# Altium PCB PCB1.PcbDoc
Units mil, origin at the board's own origin, x right, y up, seen from the top; angles counter-clockwise.
Board outline 3149.61 x 3937.01 mil, 2 copper layers (Top Layer, Bottom Layer); 99 components, 61 nets, 330 pads, 799 vias.
Unrouted connection lines stored in the file: 3.
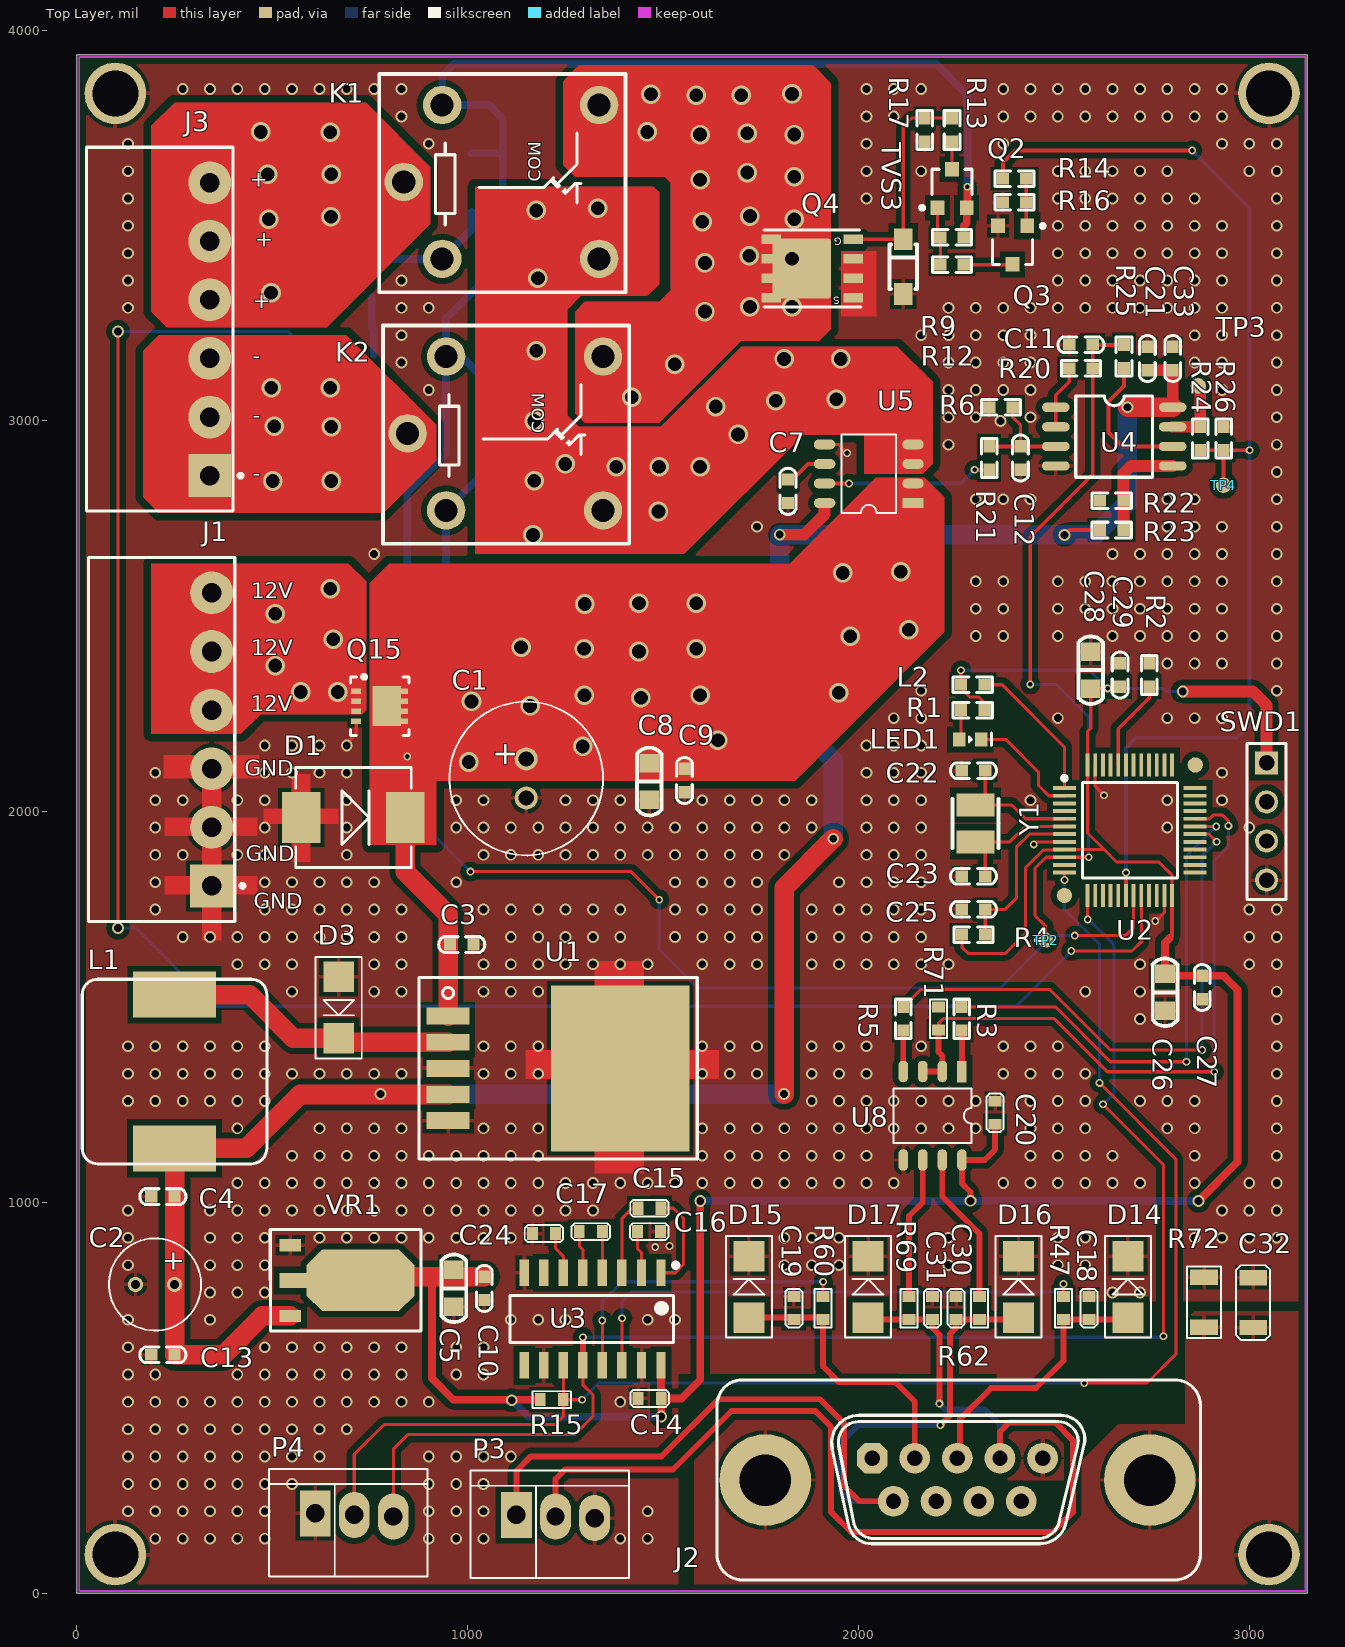
[diagram p0: Top Layer view]
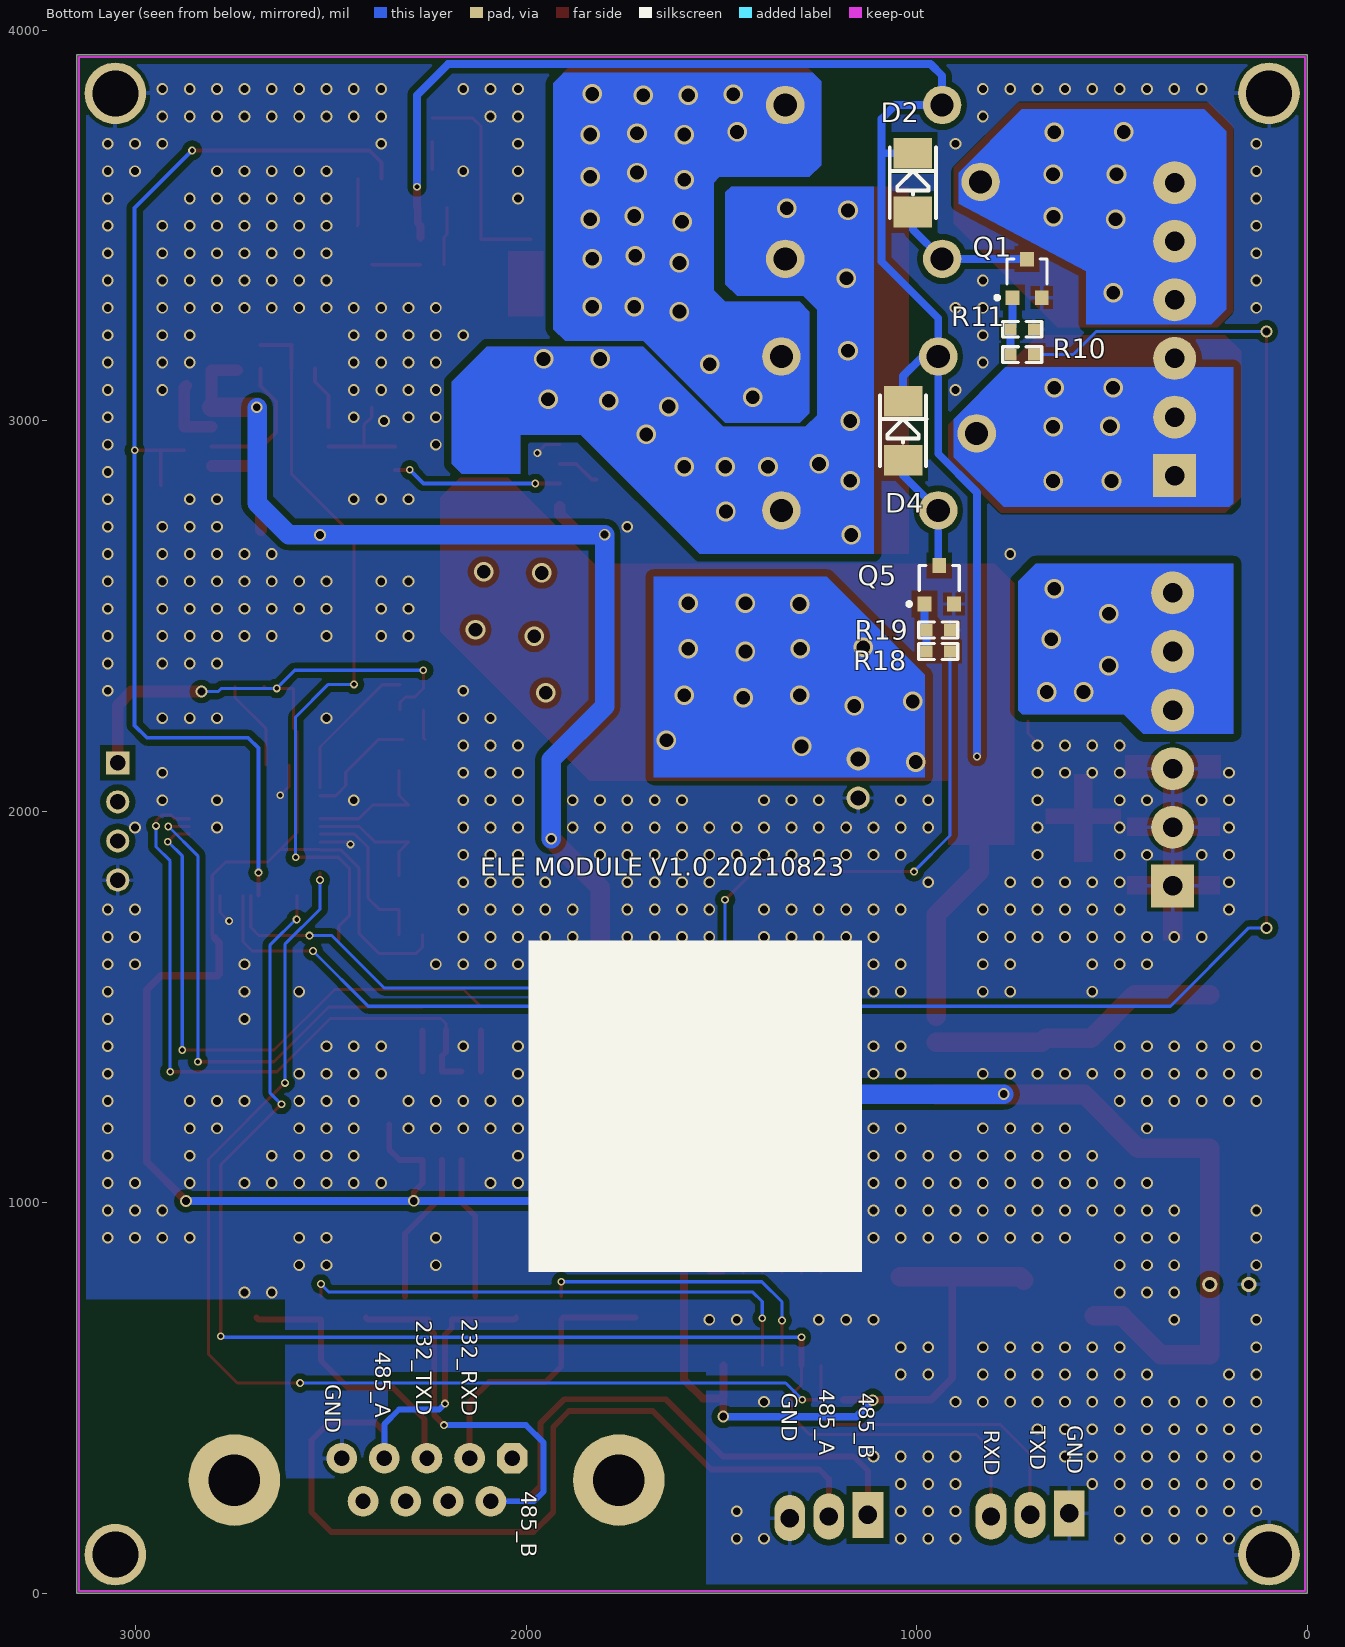
[diagram p1: Bottom Layer view, seen from below]
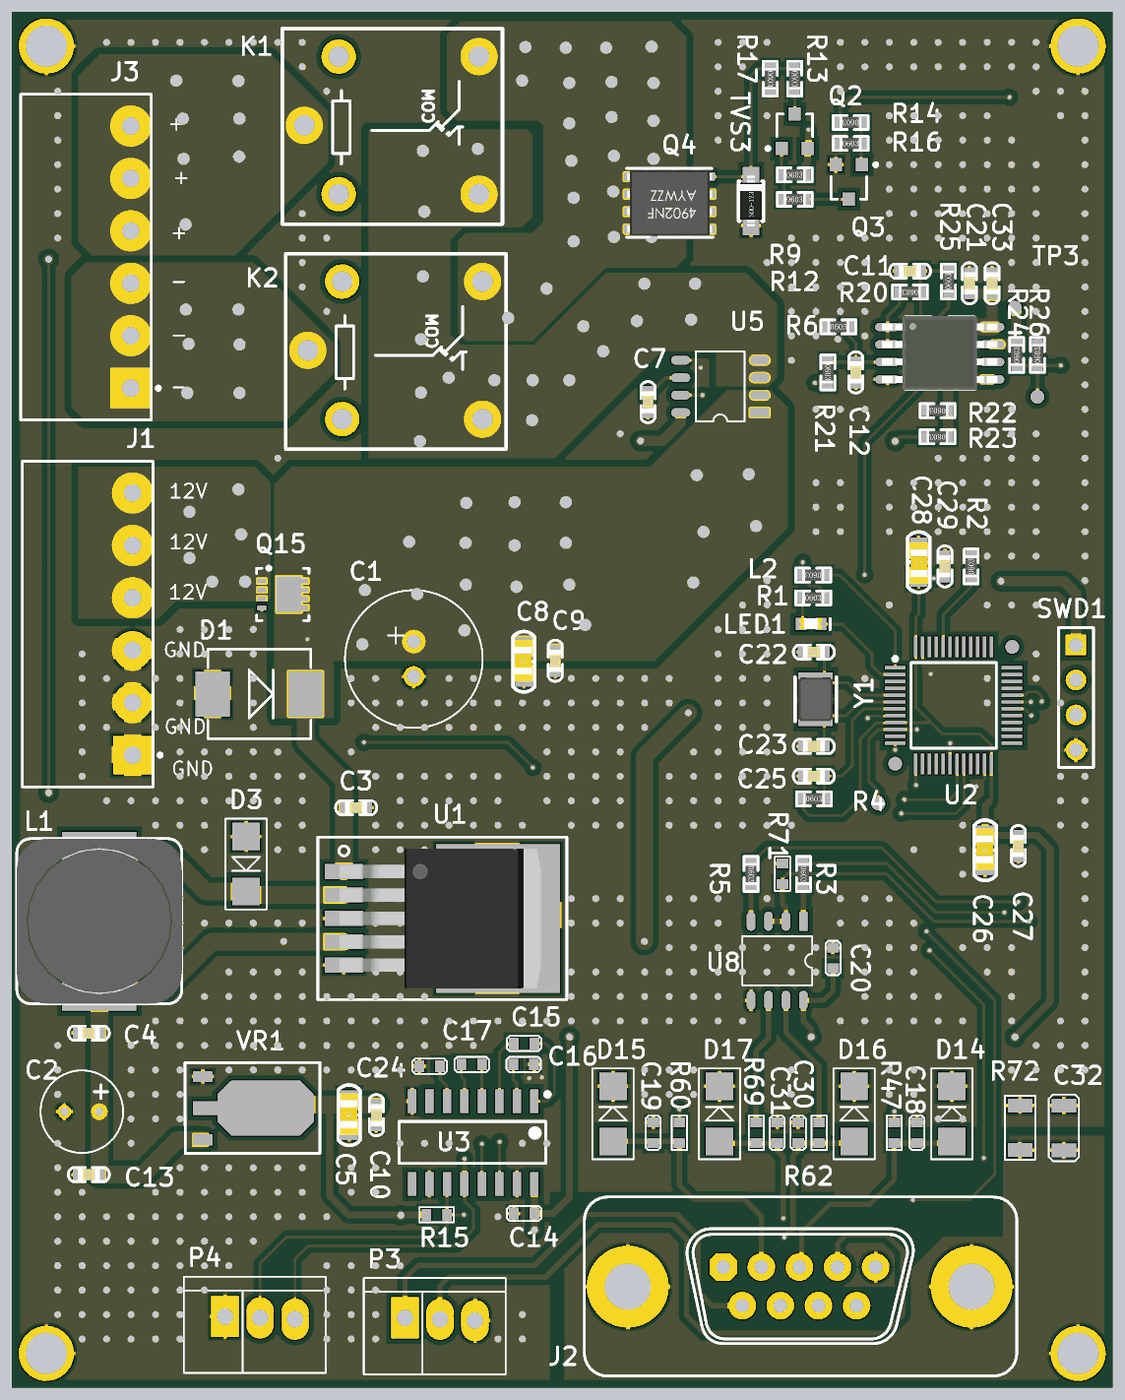
[diagram p2: 3D render of the assembled board from above, using the file's embedded part models]
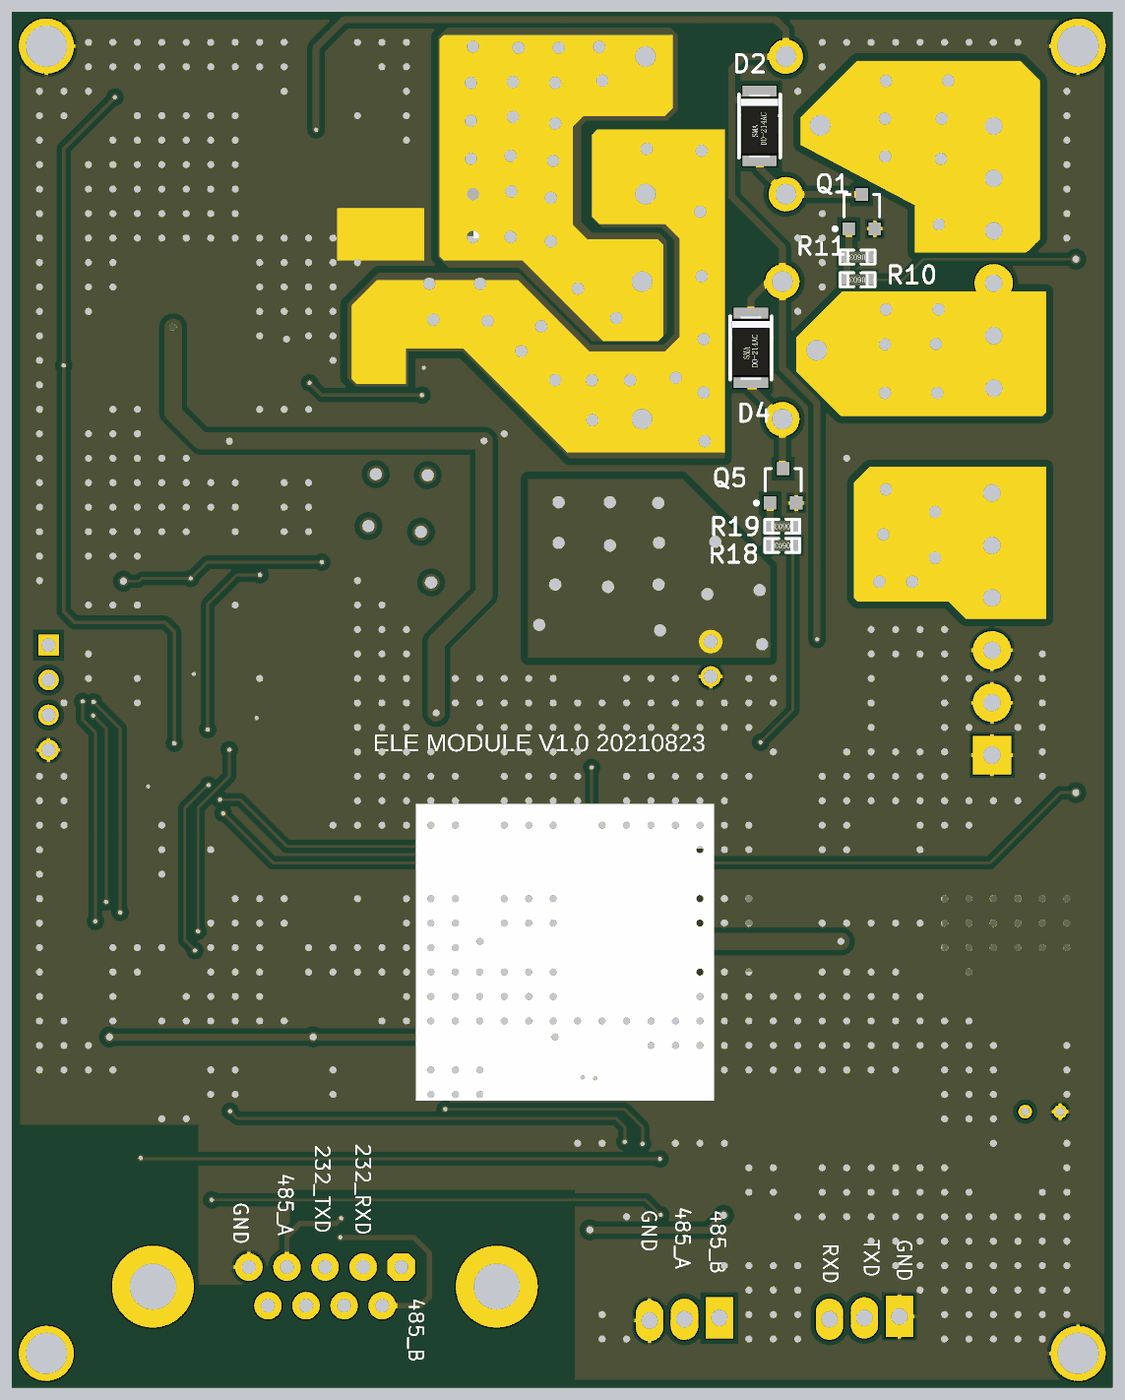
[diagram p3: 3D render of the assembled board from below, using the file's embedded part models]

## Layer stack, top to bottom
Top Solder: solder mask 0.4, Solder Resist, Dk 3.5
Top Layer: signal copper 1.4
Dielectric 1: dielectric 12.6, FR-4, Dk 4.8
Bottom Layer: signal copper 1.4
Bottom Solder: solder mask 0.4, Solder Resist, Dk 3.5

## Board outline
0,0 0,3937.01 3149.61,3937.01 3149.61,0

## Design rules (kind name [scope] priority, off if disabled: settings)
Clearance gnd [All] p1: gap=10 except(15: Track-Poly SMDPad-Poly THPad-Poly Via-Poly Fill-Fill Poly-Poly; 20: Arc-Poly Fill-Poly Poly-Region)
Clearance [All] p2: gap=10
DiffPairsRouting [All] p1: maxlimit=10 minlimit=10 mostfreqgap=10 toplayer_minwidth=15 toplayer_maxwidth=15 toplayer_prefwidth=15 bottomlayer_minwidth=15 bottomlayer_maxwidth=15 bottomlayer_prefwidth=15 maxuncoupledlength=500
MinimumSolderMaskSliver [All] p1: minsoldermaskwidth=1
PolygonConnect PolygonConnect_1 [isvia] p1: connectstyle=Direct reliefconductorwidth=10 reliefentries=4 polygonreliefangle="90 Angle" airgapwidth=10
PolygonConnect [All] p2: connectstyle=Relief reliefconductorwidth=10 reliefentries=4 polygonreliefangle="90 Angle" airgapwidth=10
RoutingVias [All] p1: holewidth=28 width=50 viastyle="Through Hole" minholewidth=28 minwidth=50 maxholewidth=28 maxwidth=50
SilkToSolderMaskClearance [IsPad] p1: minsilkscreentomaskgap=1 clearancetoexposedcopper=TRUE
SolderMaskExpansion [All] p1: expansion=4
Width [All] p1: maxlimit=500 minlimit=5 preferedwidth=10
27 further rules are at their usual default settings.

## Classes and differential pairs
component class 02_Power: C1 C2 C3 C4 C5 C8 C9 C10 C13 D1 D3 J1 L1 Q15 U1 VR1
component class 03_MCU: C22 C23 C25 C26 C27 C28 C29 L2 LED1 R1 R2 R3 R4 R5 SWD1 U2 Y1
component class 07_EL_CON: C7 C11 C12 C21 C33 C? D2 D4 J3 K1 K2 Q1 Q2 Q3 Q4 Q5 R6 R9 R10 R11 R12 R13 R14 R16 R17 R18 R19 R20 R21 R22 R23 R24 R25 R26 R? TP2 TP3 TP4 TVS3 U4 U5 U?
component class com: C14 C15 C16 C17 C18 C19 C20 C24 C30 C31 C32 D14 D15 D16 D17 J2 P3 P4 R15 R47 R60 R62 R69 R71 R72 U3 U8
differential pair 485: +485_P -485_N

## Components (designator, comment, footprint, x,y, rotation, side; value= is the part's Value field where it differs from the comment)
C1 "1000uF/35V" 10*16 1150,2085 r90 top
C2 "100uF/35V" 6*8 200,790 r0 top
C3 "104 50V" SMD-0603C 985,1660 r180 top
C4 "104 50V" SMD-0603C 220,1015 r0 top
C5 "10uF 25V" SMD-0805C 965,780 r90 top
C7 "104 50V" SMD-0603C 1820,2820 r270 top
C8 "10uF25V" SMD-0805C 1465,2077.24 r90 top
C9 "104 50V" SMD-0603C 1555,2080 r90 top
C10 "104 50V" SMD-0603C 1042.68,779.99 r90 top
C11 "NC" SMD-0603C 2570,3195 r0 top
C12 "104 50V" SMD-0603C 2415,2905 r270 top
C13 "104 50V" SMD-0603C 220,610 r0 top
C14 "104 50V" 0603C 1495.43,498.48 r180 top
C15 "104 50V" 0603C 1495,985 r180 top
C16 "104 50V" 0603C 1435,925 r0 top
C17 "104 50V" 0603C 1285.94,925 r0 top
C18 "220PF/16V" 0603C 2590,700 r90 top
C19 "220PF/16V" 0603C 1835,700 r90 top
C20 "104 50V" 0603C 2350,1200 r90 top
C21 "104 50V" SMD-0603C 2740,3160 r270 top
C22 "12P 50V" SMD-0603C 2295,2105 r180 top
C23 "12P 50V" SMD-0603C 2295,1835 r180 top
C24 "104 50V" 0603C 1225,920 r180 top
C25 "104 50V" SMD-0603C 2295,1750 r0 top
C26 "10uF 25V" SMD-0805C 2785,1537.76 r90 top
C27 "104 50V" SMD-0603C 2880,1550 r90 top
C28 "10uF 25V" SMD-0805C 2595,2362.24 r270 top
C29 "104 50V" SMD-0603C 2670,2350 r270 top
C30 "220PF/16V" 0603C 2250,700 r90 top
C31 "220PF/16V" 0603C 2190,700 r90 top
C32 "1NF/2KV" 1206C 3010.55,807.63 r270 top
C33 "104 50V" SMD-0603C 2805,3160 r270 top
D1 "SMCJ24CA" SMC 574.25,1985 r0 top
D2 "1N4007" DO-214-AC 1010,3610 r90 bottom
D3 "SS34" SMA 670,1577.48 r270 top
D4 "1N4007" DO-214-AC 1035,2975 r90 bottom
D14 "SMAJ18CA" SMA 2690,705 r90 top
D15 "SMAJ18CA" SMA 1720,705 r90 top
D16 "SMAJ6.5CA" SMA 2410,705 r90 top
D17 "SMAJ6.5CA" SMA 2025,705 r90 top
J1 "HEADER_6" DB2ERC-3P81-6P 345,1810 r90 top
J2 "DB-9P-02" DIP-9 2035.47,345.34 r0 top
J3 "HEADER_6" DB2ERC-3P81-6P 340,2860 r90 top
K1 "SRA-12VDC-CL-5" "SRA- 12V" 836.57,3611.85 r270 top
K2 "SRA-12VDC-CL-5" "SRA- 12V" 846.57,2968.15 r270 top
L1 "33uH/5a" CDRH-127 250,1335 r270 top
L2 "MPZ1608D101BTA00" SMD-0603 2292.9,2325 r180 top
LED1 "LED G" SMD-0603D 2286.27,2185.48 r0 top
P3 "1*3P" 3X2.54MMZ2 1125,200 r0 top
P4 "1*3P" 3X2.54MMZ2 610,203.94 r0 top
Q1 "SS8050" SOT-23 717.5,3365 r180 bottom
Q2 "S8550" SOT-23 2240,3595 r0 top
Q3 "SS8050" SOT-23 2395,3450 r180 top
Q4 "TPCA8016" "DFN-8 5X6" 1987.12,3465 r180 top
Q5 "SS8050" SOT-23 942.5,2580.79 r180 bottom
Q15 "AONR21321" DFN3*3-8 775,2270 r270 top
R1 "1K" SMD-0603 2292.9,2260 r0 top
R2 "100K" SMD-0603 2745,2350 r90 top
R3 "1K" SMD-0603 2265,1470 r270 top
R4 "100K" SMD-0603 2295,1685 r0 top
R5 "1K" SMD-0603 2115,1470 r270 top
R6 "10K" SMD-0603 2365,3035.39 r0 top
R9 "47K" SMD-0603 2240,3470 r0 top
R10 "1K" SMD-0603 730,3170 r0 bottom
R11 "47K" SMD-0603 730,3235 r0 bottom
R12 "2K" SMD-0603 2240,3400 r0 top
R13 "1K" SMD-0603 2240,3745 r270 top
R14 "4.7K" SMD-0603 2400,3620 r180 top
R15 "4.7K" 0603R 1185.94,495 r0 top
R16 "10K" SMD-0603 2400,3560 r0 top
R17 "4.7K" SMD-0603 2170,3745 r270 top
R18 "1K" SMD-0603 945,2410 r0 bottom
R19 "47K" SMD-0603 945,2465 r0 bottom
R20 "100R" SMD-0603 2570,3135 r180 top
R21 "10K" SMD-0603 2335,2905 r270 top
R22 "18K" SMD-0603 2648.51,2795.76 r180 top
R23 "30K" SMD-0603 2648.51,2720.76 r180 top
R24 "20K" SMD-0603 2875,2955 r90 top
R25 "47K" SMD-0603 2680,3165 r90 top
R26 "30K" SMD-0603 2935,2955 r90 top
R47 "22R 5%" 0603R 2525,759.06 r270 top
R60 "22R 5%" 0603R 1910,759.06 r270 top
R62 "8.2R 5%" 0603R 2310,759.06 r270 top
R69 "8.2R 5%" 0603R 2130,759.06 r270 top
R71 "10K" 0603R 2205,1440.94 r90 top
R72 "10M 5%" 1206r 2885,807.95 r270 top
SWD1 "SIP-4 (NC)" SIP-4 3045,1975 r270 top
TP2 "TPS" tpd 2479.44,1671.41 r0 top
TP3 "TPS" tpd 2870,3090 r0 top
TP4 "TPS" tpd 2934.57,2835.42 r0 top
TVS3 "SMF10CA" SOD-123 2115,3395 r90 top
U1 "LM2596S 5.0V" TO-263-5 950,1343.07 r270 top
U2 "GD32F103C8T6" LQFP48 2527.52,2060.59 r0 top
U3 "TPT3232E-SO3R/NC" SO-16Z 1495,820 r270 top
U4 "OPA2376AIDR" SOIC-8 2655,2960 r0 top
U5 "ACS712ELCTR-20A-T" SO-8 2140,2790 r180 top
U8 "TP8485E-SR" SO-8 2265,1335 r270 top
VR1 "LM1117 3.3V" SOT223 546.06,890.55 r270 top
Y1 "8MHz" XTAL-3225-2 2300,1970 r270 top

## Footprints (in the part's own frame and the unit in brackets; to place one, negate y for a bottom-side part, rotate by r counter-clockwise, add the part's x,y. Pads: shape width x height; smd on the part's side, far side on the other; paste and mask are expansions set on the pad)
3X2.54MMZ2 [mm]
  rect 2x3 hole 1.2: 1(0,0)
  oval 2x3 hole 1.2: 2(2.54,-0.1) 3(5.08,-0.2)
  silkscreen extent -3,-4.1 7.31,2.9
6*8 [mm]
  round 1 hole 0.6: 1(1.27,0) 2(-1.27,0)
  silkscreen extent -3,-3 3,3
10*16 [mm]
  round 1.5 hole 1: 1(1.27,0) 2(-1.27,0)
  silkscreen extent -5,-5 5,5
0603C [mm]
  rect 0.7x0.85 smd: 1(0,0) 2(1.5,0)
  silkscreen extent -0.5,-0.55 2,0.55
0603R [mm]
  rect 0.7x0.85 smd: 1(0,0) 2(1.5,0)
  silkscreen extent -0.5,-0.55 2,0.55
1206C [mm]
  rect 1x1.8 smd: 1(0,0) 2(3.25,0)
  silkscreen extent -0.8,-1.1 4.05,1.1
1206r [mm]
  rect 1x1.8 smd: 1(0,0) 2(3.25,0)
  silkscreen extent -0.7,-1.1 3.95,1.1
CDRH-127 [mm]
  rect 3x5.4 smd: 1(-5,0) 2(5,0)
  silkscreen extent -6,-6 6,6, body extent -6,-6 6,6, height 8.2
DB2ERC-3P81-6P [mil]
  rect 109.84x109.84 hole 50: 1(0,0)
  round 109.84 hole 50: 2(150,0) 3(300,0) 4(450,0) 5(600,0) 6(750,0)
  silkscreen extent -91,-84 841,315
DFN3*3-8 [mm]
  rect 0.35x0.65 smd: 1(0.975,-1.525) 2(-0.975,1.525) 2(-0.325,1.525) 2(0.325,1.525) 2(0.975,1.525) 3(-0.975,-1.525) 3(-0.325,-1.525) 3(0.325,-1.525)
  rect 2.6x1.84 smd: 2(0,0.45)
  silkscreen extent -2.03,-1.9 1.9,1.9, body extent -1.75,-1.75 1.75,1.75, height 0.8
"DFN-8 5X6" [mm]
  rrect10% 1.27x0.61 smd: 1(0,0) 2(5.34,0) 2(5.34,1.27) 2(5.34,3.81) 2(5.34,2.54) 3(0,3.81) 3(0,1.27) 3(0,2.54)
  rrect10% 3.81x3.91 smd: 2(3.356,1.905)
  silkscreen extent -0.5,-0.6 5.8,4.4, body extent -0.41,-0.67 5.74,4.48, height 1
DIP-9 [mm]
  oct 2x2 hole 1: 1(0,0)
  round 2 hole 1: 2(2.77,0) 3(5.54,0) 4(8.31,0) 5(11.08,0) 6(9.695,-2.803) 7(6.925,-2.803) 8(4.155,-2.803) 9(1.385,-2.803)
  round 5.95 hole 3.35: 10(-6.94,-1.42) 11(18.055,-1.42)
  silkscreen extent -10.09,-7.92 21.34,5.09
DO-214-AC [mm]
  rect 2x2.5 smd: 1(-1.915,0) 2(1.915,0)
  silkscreen extent -2.3,-1.52 2.3,1.5, body extent -2.3,-1.35 2.3,1.35, height 2.4
LQFP48 [mm]
  round 1 smd: 0(0,-6.985) 0(8.509,1.5)
  rect 1.5x0.25 smd: 1(0,0) 2(0,-0.5) 3(0,-1) 4(0,-1.5) 5(0,-2) 6(0,-2.5) 7(0,-3) 8(0,-3.5) 9(0,-4) 10(0,-4.5) 11(0,-5) 12(0,-5.5) 25(8.495,-5.5) 26(8.495,-5) 27(8.495,-4.5) 28(8.495,-4) 29(8.495,-3.5) 30(8.495,-3) 31(8.495,-2.5) 32(8.495,-2) 33(8.495,-1.5) 34(8.495,-1) 35(8.495,-0.5) 36(8.495,0)
  rect 0.25x1.5 smd: 13(1.5,-7) 14(2,-7) 15(2.5,-7) 16(3,-7) 17(3.5,-7) 18(4,-7) 19(4.5,-7) 20(5,-7) 21(5.5,-7) 22(6,-7) 23(6.5,-7) 24(7,-7) 37(7,1.5) 38(6.5,1.5) 39(6,1.5) 40(5.5,1.5) 41(5,1.5) 42(4.5,1.5) 43(4,1.5) 44(3.5,1.5) 45(3,1.5) 46(2.5,1.5) 47(2,1.5) 48(1.5,1.5)
  silkscreen extent -0.13,-5.86 7.35,0.76
SIP-4 [mm]
  rect 1.5x1.5 hole 1: 1(-3.81,0)
  round 1.5 hole 1: 2(-1.27,0) 3(1.27,0) 4(3.81,0)
  silkscreen extent -5.08,-1.27 5.08,1.27
SMA [mm]
  rect 2x2 smd: 1(0,0) 2(4,0)
  silkscreen extent -1.3,-1.5 5.3,1.5
SMC [mm]
  rect 2.5x3.3 smd: 1(0,0) 2(6.75,0)
  silkscreen extent -0.35,-3.25 7.15,3.25
SMD-0603 [mil]
  rect 31.5x30 smd: 1(-30,0) 2(30,0)
  silkscreen extent -50,-20 50,20, body extent -31,-16 32,16, height 18
SMD-0603C [mil]
  rect 31.5x30 smd: 1(-30,0) 2(30,0)
  silkscreen extent -59,-20 59,20, body extent -32,-16 32,16, height 31
SMD-0603D [mm]
  rect 0.8x0.9 smd: 1(-0.7,-0.012) 2(0.73,-0.012)
  silkscreen extent -0.08,-0.41 1.4,0.39, body extent -0.8,-0.39 0.8,0.41, height 0.6
SMD-0805C [mm]
  rect 1.2x1.27 smd: 1(-1.2,0) 2(1.2,0)
  silkscreen extent -2.2,-0.8 2.2,0.8, body extent -1.42,-0.67 1.58,0.73, height 0.93
SO-8 [mil]
  rect 55x25 smd: 1(0,0)
  oval 55x25 smd: 2(0,-50) 3(0,-100) 4(0,-150) 5(226.38,-150) 6(226.38,-100) 7(226.38,-50) 8(226.38,0)
  silkscreen extent 43,-175 183,25
SO-16Z [mil]
  rect 68x24 smd: 1(0,0) 2(0,-50) 3(0,-100) 4(0,-150) 5(0,-200) 6(0,-250) 7(0,-300) 8(0,-350) 9(237.11,-350) 10(237.11,-300) 11(237.11,-250) 12(237.11,-200) 13(237.11,-150) 14(237.11,-100) 15(237.11,-50) 16(237.11,0)
  silkscreen extent -19,-387 178,38
SOD-123 [mm]
  rect 1.4x1.2 smd: 1(-1.778,0) 2(1.778,0)
  silkscreen extent -1.45,-0.9 1.45,0.9, body extent -1.85,-0.8 1.85,0.8, height 1.2
SOIC-8 [mm]
  oval 1.8x0.6 smd: 1(-3.8,1.905) 2(-3.8,0.635) 3(-3.8,-0.635) 4(-3.8,-1.905) 5(3.8,-1.905) 6(3.8,-0.635) 7(3.8,0.635) 8(3.8,1.905)
  silkscreen extent -2.5,-2.64 2.5,2.64, body extent -4.2,-2.69 4.2,2.69, height 2.3
SOT223 [mm]
  rect 0.8x1.4 smd: 1(0,0) 3(4.6,0)
  rect 1x1.854 smd: 2(2.3,0.227)
  oct 4x7 smd: 4(2.286,4.572)
  silkscreen extent -1.02,-1.3 5.59,8.51
SOT-23 [mm] "SOT-23; 3 Leads; Body 3.0 x 2.6 mm, inc. leads (LxW max)"
  rect 0.9x0.95 smd: 1(-0.95,-1.25) 2(0.95,-1.25) 3(0,1.25)
  silkscreen extent -2.08,-1.37 1.3,1.25
"SRA- 12V" [mm]
  round 2.5 hole 1.5: 1(0,0) 2(5,12.7) 3(-5,12.7) 4(5,2.5) 5(-5,2.5)
  silkscreen extent -7.03,-1.59 7.17,14.41
TO-263-5 [mm]
  rect 1.1x2.8 smd: 1(-3.4,0) 2(-1.7,0) 3(0,0) 4(1.7,0) 5(3.4,0)
  rect 10.8x9 smd: 6(0,11.2)
  silkscreen extent -5.9,-1.9 5.9,16.2, body extent -5.08,-0.32 5.08,14.32, height 4.57
tpd [mm]
  round 1 smd: 1(0,0)
XTAL-3225-2 [mm]
  rect 1.5x2.5 smd: 1(-1.2,0) 2(1.2,0)
  silkscreen extent -1.6,-1.5 1.6,1.5, body extent -1.6,-1.25 1.6,1.25, height 0.9

## Part data
C1 C2: library part CAP2, "电解电容"
C3 C4 C8 C9 C10 C11 C12 C13: library part CAP4, "贴片电容 10%"
C5 C21 C25 C26 C27 C28 C29 C33: library part CAP4, "贴片电容 20%"
C7: library part C, "贴片电容 10%"
C14 C15 C16 C17 C18 C19 C20 C24 C30 C31 C32: library part CAP
C22 C23: library part CAP4, "贴片电容 5%"
D1 D3: library part DIODE
D2 D4: library part DIODE2, "贴片二极管"
D14 D15 D16 D17: library part D_ESD
J2: library part DB9
K1 K2: library part JDQ1, "5V 继电器"
L1: library part IND
L2: library part CIZHU1, "磁珠电感 100R 100MHz"
LED1: library part LED, "绿色普亮"
P3 P4: library part HDR1*3
Q1 Q3 Q5: library part NPN-1, "三极管"
Q2: library part PNP, "PNP"
Q4: library part SI7860
Q15: library part "MOSFET N", "MOSFET N"
R1 R20: library part RES0, "贴片电阻 5%"
R2 R3 R4 R5 R10 R11 R18 R19: library part RES2, "贴片电阻 5%"
R6 R21: library part RES0, "贴片电阻 1%"
R9 R12 R13 R14 R16 R17 R22 R23 R24 R25 R26: library part RES-SOP, "贴片电阻 5%"
R15 R47 R60 R62 R69 R71 R72: library part RES
SWD1: library part SIP-4, "ISP 下载"
TVS3: library part TVS-1, "TVS 10V"
U1: library part LM2596
U2: library part STM32F103C6
U3: library part TPT3232E-SO3R
U4: library part LM358, "运算放大器"
U5: library part ACS712, "HALL 20A 电流传感器"
VR1: library part LM1117, "三端稳压器"
Y1: library part XTAL, "3225 贴片晶振"

## Free pads (board coordinates)
  round 157.48 hole 118.11: 0(98.43,98.43) 0(98.43,3838.58) 0(3051.18,98.43) 0(3051.18,3838.58)

## Via types
v1: diameter 30, hole 20, Top Layer to Bottom Layer, tented both sides, 679 vias
v2: diameter 50, hole 35, Top Layer to Bottom Layer, tented both sides, 79 vias
v3: diameter 20, hole 12, Top Layer to Bottom Layer, tented both sides, 41 vias

## Nets (pads, with @x,y where several pads share a name; then routed paths per layer and width w, separated by ;. In a path a pad name is that pad's centre, name@x,y a point inside that pad or via, vN(x,y) a via of type N, cw(c..) or ccw(c..) an arc to the next point about the centre after c; other vN are vias at no path point)
3.3V: C5.2 C10.2 C14.1 C20.1 C26.2 C27.2 C28.2 C29.2 L2.2 R1.2 R4.1 R15.1 SWD1.1 U2.9 U2.24 U2.48 U3.16 U8.8 VR1.2 | length 7012.2
  Top Layer w8: C14.1@1495,498.91 C14.1 ; v3(2262.9,2361.89) L2.2 2262.9,2315.25 2284.51,2293.64 2308.02,2293.64 2322.9,2278.76 R1.2 ; R4.1 2265,1653.1 2280.62,1637.48 2376.74,1637.48 2427.84,1688.57 2427.84,1856.35 2473.83,1902.35 2526.76,1902.35 U2.9 2629.04,1903.11 ; C29.2 2665,2315 C28.2 2595,2213.71 2586.57,2205.29 U2.48 2586.57,1945.57 2629.04,1903.11 ; U2.24 2803.11,1837.11 2768.86,1871.36 2660.79,1871.36 2629.04,1903.11
  Top Layer w10: 2796.67,1676.47 2803.11,1682.91 U2.24
  Top Layer w15: v1(2287.36,1003.93) 2287.36,1026.63 2265,1049 U8.8 2323.62,1108.62 2350,1135 C20.1
  Top Layer w20: 908.97,809.99 908.97,549.73 963.7,495 R15.1 ; C14.1@1495,498.91 U3.16 ; v1(1495.43,451.79) C14.1 1547.77,498.48 1595.65,546.36 v1(1595.65,1003.6) ; 2796.67,1676.47 2785,1664.8 C26.2 2790,1580 C27.2 2934.85,1580 2970.64,1544.21 2970.64,1103.73 v1(2870.52,1003.6)
  Top Layer w30: v1(2830.52,2307.75) 3009.78,2307.75 3045,2272.53 SWD1.1
  Top Layer w50: 726.06,800.55 735.5,809.99 908.97,809.99 C10.2
  Bottom Layer w8: v3(2262.9,2361.89) 2591.85,2361.89 v3(2638.11,2315.62) 2779.58,2315.62 2787.45,2307.75 v1(2830.52,2307.75)
  Bottom Layer w20: v1(1113.01,493.51) 1155.21,451.31 v1@1495.43,451.31 ; v1(1595.65,1003.6) v1(2870.52,1003.6)
485_N: C30.1 D16.1 J2.9 P3.1 R62.2 | length 2348.9
  Top Layer w15: P3.1 1125,313.19 1161.82,350 1496.35,350 1642.62,496.27 1902.05,496.27 1963.38,434.94 1963.38,274.4 2002.78,235 J2.9 ; v3(2210,430) 2235,455 2235,663.72 2250,678.72 C30.1 R62.2 2405,700 D16.1
  Bottom Layer w15: J2.9 1980,235 1955,260 1955,385 2000,430 v3(2210,430)
485_P: C31.1 D17.1 J2.4 P3.2 R69.2 | length 2889.3
  Top Layer w15: P3.2 1225,291.65 1249.58,316.24 1525.97,316.24 1675.58,465.84 1889.85,465.84 1930.42,425.27 1930.42,207.2 1981.13,156.49 2498.4,156.49 2549.12,207.2 2549.12,391.31 2503.31,437.12 2386.66,437.12 2362.64,413.1 J2.4 ; D17.1 2030,700 R69.2 C31.1 2190,678.72 2207.5,661.22 v3(2207.5,485)
  Bottom Layer w15: v3(2207.5,485) 2222.5,470 2325,470 2362.64,432.36 J2.4
ELE_PWM: R14.2 R24.1 R26.1 TP4.1 U2.18 | length 3006.5
  Top Layer w10: R14.2 2370,3661.71 2400.76,3692.47 v3(2854.65,3692.47) ; U2.18 v3(2685,1843.97) ; R24.1 R26.1 ; TP4.1 2935,2835.85 R26.1 ; v3(3001.64,2925) R26.1
  Bottom Layer w10: v3(2685,1843.97) 2685,2162.9 2711.26,2189.16 2969.82,2189.16 3001.64,2220.98 v3(3001.64,2925) 3001.64,3545.47 v3(2854.65,3692.47)
EN1_485: R71.1 U2.32 U8.2 U8.3 | length 1696.7
  Top Layer w8: R71.1 2205,1457.67 2217.58,1470.25 2285.8,1470.25 2285.89,1470.34 2501.61,1470.34 2637.54,1334.42 v3(2910.85,1334.42) ; U2.32 2898.8,1981.85 2908.14,1991.18 2932.83,1991.18 2947.15,1976.86 v3(2947.15,1963.67)
  Top Layer w15: U8.3 U8.2 2215,1375 2205,1385 R71.1
  Bottom Layer w8: v3(2910.85,1334.42) 2910.85,1874.01 2947.15,1910.31 v3(2947.15,1963.67)
GND: C1.2 C2.2 C3.1 C4.1 C5.1 C7.2 C8.1 C9.1 C10.1 C11.1 C12.2 C13.1 C14.2 C16.2 C18.2 C19.2 C20.2 C21.1 C22.2 C23.2 C24.2 C25.1 C26.1 C27.1 C28.1 C29.1 C30.2 C31.2 C32.1 C33.1 D1.1 D3.1 D14.2 D15.2 D16.2 D17.2 J1.1 J1.2 J1.3 J2.5 P3.3 P4.1 pad.0@98.43,98.43 pad.0@98.43,3838.58 pad.0@3051.18,3838.58 Q1.2 Q3.2 Q4.3 Q5.2 Q15.1 R2.2 R6.1 R11.1 R16.1 R17.2 R19.1 R22.2 R26.2 R71.2 R72.1 SWD1.4 TVS3.1 U1.3 U1.5 U1.6 U2.8 U2.23 U2.47 U3.8 U3.10 U3.15 U4.4 U5.5 U8.5 VR1.1 | length 381.2
  Top Layer w8: v1@690,2175 714.96,2199.96 Q15.1 ; U5.5 1949.31,2940 v3@1973.15,2916.16 ; v3@2448.63,1915.84 2454.83,1922.03 2526.76,1922.03 U2.8 ; U2.47 2606.26,2065.02 v3(2629.04,2042.24) ; v3@2760,1718.5 2783.43,1741.93 U2.23
  other v1: 200.78,139.48 270.78,139.48 340.78,139.48 410.78,139.48 480.78,139.48 900.78,139.48 970.78,139.48 1040.78,139.48 1390.78,139.48 1460.78,139.48 130.78,209.48 200.78,209.48 270.78,209.48 340.78,209.48 410.78,209.48 480.78,209.48 900.78,209.48 970.78,209.48 1040.78,209.48 1460.78,209.48 130.78,279.48 200.78,279.48 270.78,279.48 340.78,279.48 410.78,279.48 480.78,279.48 550.78,279.48 900.78,279.48 970.78,279.48 1040.78,279.48 130.78,349.48 200.78,349.48 270.78,349.48 340.78,349.48 410.78,349.48 480.78,349.48 550.78,349.48 620.78,349.48 900.78,349.48 970.78,349.48 1040.78,349.48 1110.78,349.48 130.78,419.48 200.78,419.48 270.78,419.48 340.78,419.48 410.78,419.48 480.78,419.48 550.78,419.48 620.78,419.48 690.78,419.48 130.78,489.48 200.78,489.48 270.78,489.48 340.78,489.48 410.78,489.48 480.78,489.48 550.78,489.48 620.78,489.48 690.78,489.48 760.78,489.48 830.78,489.48 900.78,489.48 1390.78,489.48 130.78,559.48 200.78,559.48 410.78,559.48 480.78,559.48 550.78,559.48 620.78,559.48 690.78,559.48 760.78,559.48 830.78,559.48 970.78,559.48 1040.78,559.48 130.78,629.48 480.78,629.48 550.78,629.48 620.78,629.48 690.78,629.48 760.78,629.48 830.78,629.48 970.78,629.48 1040.78,629.48 130.78,699.48 340.78,699.48 1110.78,699.48 1180.78,699.48 1250.78,699.48 1460.78,699.48 1530.78,699.48 340.78,769.48 410.78,769.48 480.78,769.48 2650.78,769.48 2720.78,769.48 130.78,839.48 340.78,839.48 410.78,839.48 480.78,839.48 1810.78,839.48 1880.78,839.48 1950.78,839.48 2230.78,839.48 2510.78,839.48 2580.78,839.48 130.78,909.48 340.78,909.48 410.78,909.48 480.78,909.48 620.78,909.48 690.78,909.48 760.78,909.48 830.78,909.48 900.78,909.48 970.78,909.48 1040.78,909.48 1110.78,909.48 1810.78,909.48 1880.78,909.48 1950.78,909.48 2230.78,909.48 2510.78,909.48 2580.78,909.48 2860.78,909.48 2930.78,909.48 3000.78,909.48 3070.78,909.48 130.78,979.48 340.78,979.48 410.78,979.48 480.78,979.48 550.78,979.48 620.78,979.48 690.78,979.48 760.78,979.48 830.78,979.48 900.78,979.48 970.78,979.48 1040.78,979.48 1110.78,979.48 1180.78,979.48 1250.78,979.48 1320.78,979.48 2930.78,979.48 3000.78,979.48 3070.78,979.48 410.78,1049.48 480.78,1049.48 550.78,1049.48 620.78,1049.48 690.78,1049.48 760.78,1049.48 830.78,1049.48 900.78,1049.48 970.78,1049.48 1040.78,1049.48 1110.78,1049.48 1180.78,1049.48 1250.78,1049.48 1320.78,1049.48 1390.78,1049.48 1460.78,1049.48 1530.78,1049.48 1600.78,1049.48 1670.78,1049.48 1740.78,1049.48 1810.78,1049.48 1880.78,1049.48 1950.78,1049.48 2020.78,1049.48 2090.78,1049.48 2370.78,1049.48 2440.78,1049.48 2510.78,1049.48 2580.78,1049.48 2650.78,1049.48 2720.78,1049.48 2860.78,1049.48 3000.78,1049.48 3070.78,1049.48 550.78,1119.48 620.78,1119.48 690.78,1119.48 760.78,1119.48 830.78,1119.48 900.78,1119.48 970.78,1119.48 1040.78,1119.48 1110.78,1119.48 1180.78,1119.48 1600.78,1119.48 1670.78,1119.48 1740.78,1119.48 1810.78,1119.48 1880.78,1119.48 1950.78,1119.48 2020.78,1119.48 2440.78,1119.48 2510.78,1119.48 2580.78,1119.48 2650.78,1119.48 2860.78,1119.48 3070.78,1119.48 410.78,1189.48 620.78,1189.48 690.78,1189.48 760.78,1189.48 830.78,1189.48 1040.78,1189.48 1110.78,1189.48 1180.78,1189.48 1600.78,1189.48 1670.78,1189.48 1740.78,1189.48 1810.78,1189.48 1880.78,1189.48 1950.78,1189.48 2020.78,1189.48 2090.78,1189.48 2160.78,1189.48 2230.78,1189.48 2300.78,1189.48 2440.78,1189.48 2510.78,1189.48 2580.78,1189.48 2790.78,1189.48 2860.78,1189.48 3070.78,1189.48 130.78,1259.48 200.78,1259.48 270.78,1259.48 340.78,1259.48 410.78,1259.48 480.78,1259.48 1880.78,1259.48 1950.78,1259.48 2020.78,1259.48 2090.78,1259.48 2160.78,1259.48 2230.78,1259.48 2300.78,1259.48 2440.78,1259.48 2510.78,1259.48 2580.78,1259.48 2720.78,1259.48 2790.78,1259.48 2860.78,1259.48 3070.78,1259.48 130.78,1329.48 200.78,1329.48 270.78,1329.48 340.78,1329.48 410.78,1329.48 480.78,1329.48 550.78,1329.48 620.78,1329.48 690.78,1329.48 760.78,1329.48 830.78,1329.48 1040.78,1329.48 1110.78,1329.48 1180.78,1329.48 1600.78,1329.48 1670.78,1329.48 1740.78,1329.48 1880.78,1329.48 1950.78,1329.48 2020.78,1329.48 2370.78,1329.48 2440.78,1329.48 2510.78,1329.48 2580.78,1329.48 3070.78,1329.48 130.78,1399.48 200.78,1399.48 270.78,1399.48 340.78,1399.48 410.78,1399.48 480.78,1399.48 1040.78,1399.48 1110.78,1399.48 1180.78,1399.48 1600.78,1399.48 1670.78,1399.48 1740.78,1399.48 1880.78,1399.48 1950.78,1399.48 2020.78,1399.48 2160.78,1399.48 2370.78,1399.48 2440.78,1399.48 2510.78,1399.48 3070.78,1399.48 2720.78,1469.48 3070.78,1469.48 550.78,1539.48 760.78,1539.48 830.78,1539.48 1040.78,1539.48 1110.78,1539.48 1180.78,1539.48 2580.78,1539.48 2720.78,1539.48 3070.78,1539.48 410.78,1609.48 480.78,1609.48 550.78,1609.48 760.78,1609.48 830.78,1609.48 1040.78,1609.48 1110.78,1609.48 1180.78,1609.48 1250.78,1609.48 1320.78,1609.48 1390.78,1609.48 1460.78,1609.48 1600.78,1609.48 1670.78,1609.48 1740.78,1609.48 1880.78,1609.48 1950.78,1609.48 2020.78,1609.48 2090.78,1609.48 2160.78,1609.48 2230.78,1609.48 2720.78,1609.48 3000.78,1609.48 3070.78,1609.48 270.78,1679.48 340.78,1679.48 410.78,1679.48 480.78,1679.48 550.78,1679.48 620.78,1679.48 690.78,1679.48 760.78,1679.48 830.78,1679.48 1110.78,1679.48 1180.78,1679.48 1250.78,1679.48 1320.78,1679.48 1390.78,1679.48 1530.78,1679.48 1600.78,1679.48 1670.78,1679.48 1740.78,1679.48 1880.78,1679.48 1950.78,1679.48 2020.78,1679.48 2090.78,1679.48 2160.78,1679.48 3000.78,1679.48 3070.78,1679.48 200.78,1749.48 480.78,1749.48 550.78,1749.48 620.78,1749.48 690.78,1749.48 760.78,1749.48 830.78,1749.48 1040.78,1749.48 1110.78,1749.48 1180.78,1749.48 1250.78,1749.48 1320.78,1749.48 1390.78,1749.48 1530.78,1749.48 1600.78,1749.48 1670.78,1749.48 1740.78,1749.48 1880.78,1749.48 1950.78,1749.48 2020.78,1749.48 2090.78,1749.48 2160.78,1749.48 3000.78,1749.48 3070.78,1749.48 200.78,1819.48 480.78,1819.48 550.78,1819.48 620.78,1819.48 690.78,1819.48 760.78,1819.48 970.78,1819.48 1530.78,1819.48 1600.78,1819.48 1670.78,1819.48 1740.78,1819.48 1950.78,1819.48 2020.78,1819.48 2090.78,1819.48 2160.78,1819.48 200.78,1889.48 270.78,1889.48 410.78,1889.48 480.78,1889.48 690.78,1889.48 1040.78,1889.48 1110.78,1889.48 1180.78,1889.48 1250.78,1889.48 1320.78,1889.48 1390.78,1889.48 1460.78,1889.48 1530.78,1889.48 1600.78,1889.48 1670.78,1889.48 1740.78,1889.48 1810.78,1889.48 2020.78,1889.48 2090.78,1889.48 2160.78,1889.48 200.78,1959.48 480.78,1959.48 690.78,1959.48 970.78,1959.48 1040.78,1959.48 1110.78,1959.48 1180.78,1959.48 1250.78,1959.48 1320.78,1959.48 1390.78,1959.48 1460.78,1959.48 1530.78,1959.48 1600.78,1959.48 1670.78,1959.48 1740.78,1959.48 1810.78,1959.48 1880.78,1959.48 2020.78,1959.48 2090.78,1959.48 2160.78,1959.48 2790.78,1959.48 3000.78,1959.48 200.78,2029.48 270.78,2029.48 410.78,2029.48 480.78,2029.48 690.78,2029.48 970.78,2029.48 1040.78,2029.48 1250.78,2029.48 1320.78,2029.48 1390.78,2029.48 1600.78,2029.48 1670.78,2029.48 1740.78,2029.48 1810.78,2029.48 1880.78,2029.48 2020.78,2029.48 2090.78,2029.48 2160.78,2029.48 2440.78,2029.48 2790.78,2029.48 2930.78,2029.48 200.78,2099.48 480.78,2099.48 550.78,2099.48 620.78,2099.48 690.78,2099.48 2020.78,2099.48 2090.78,2099.48 2160.78,2099.48 2930.78,2099.48 480.78,2169.48 550.78,2169.48 620.78,2169.48 690.78,2169.48 2020.78,2169.48 2090.78,2169.48 2160.78,2169.48 2090.78,2239.48 2160.78,2239.48 2510.78,2239.48 2790.78,2239.48 2860.78,2239.48 2930.78,2239.48 2160.78,2309.48 3070.78,2309.48 2790.78,2379.48 2860.78,2379.48 2930.78,2379.48 3070.78,2379.48 2300.78,2449.48 2370.78,2449.48 2510.78,2449.48 2650.78,2449.48 2720.78,2449.48 2790.78,2449.48 2860.78,2449.48 2930.78,2449.48 3070.78,2449.48 2300.78,2519.48 2370.78,2519.48 2510.78,2519.48 2580.78,2519.48 2650.78,2519.48 2720.78,2519.48 2790.78,2519.48 2860.78,2519.48 2930.78,2519.48 3070.78,2519.48 2300.78,2589.48 2370.78,2589.48 2510.78,2589.48 2580.78,2589.48 2650.78,2589.48 2720.78,2589.48 2790.78,2589.48 2860.78,2589.48 2930.78,2589.48 3070.78,2589.48 760.78,2659.48 2650.78,2659.48 2720.78,2659.48 2790.78,2659.48 2860.78,2659.48 2930.78,2659.48 3070.78,2659.48 1740.78,2729.48 2790.78,2729.48 2860.78,2729.48 2930.78,2729.48 3070.78,2729.48 2300.78,2799.48 2370.78,2799.48 2440.78,2799.48 2790.78,2799.48 2860.78,2799.48 3070.78,2799.48 3070.78,2869.48 2230.78,2939.48 3070.78,2939.48 2363.7,3000 2230.78,3009.48 2300.78,3009.48 2440.78,3009.48 3070.78,3009.48 900.78,3079.48 2230.78,3079.48 2300.78,3079.48 2370.78,3079.48 2440.78,3079.48 2930.78,3079.48 3070.78,3079.48 830.78,3149.48 2230.78,3149.48 2300.78,3149.48 2370.78,3149.48 2440.78,3149.48 2860.78,3149.48 2930.78,3149.48 3070.78,3149.48 830.78,3219.48 2160.78,3219.48 2230.78,3219.48 2300.78,3219.48 2370.78,3219.48 2440.78,3219.48 2860.78,3219.48 2930.78,3219.48 3070.78,3219.48 130.78,3289.48 830.78,3289.48 900.78,3289.48 2230.78,3289.48 2300.78,3289.48 2370.78,3289.48 2440.78,3289.48 2510.78,3289.48 2580.78,3289.48 2650.78,3289.48 2720.78,3289.48 2790.78,3289.48 2860.78,3289.48 2930.78,3289.48 3070.78,3289.48 130.78,3359.48 830.78,3359.48 2510.78,3359.48 2580.78,3359.48 2650.78,3359.48 2720.78,3359.48 2790.78,3359.48 2860.78,3359.48 2930.78,3359.48 3070.78,3359.48 130.78,3429.48 2510.78,3429.48 2580.78,3429.48 2650.78,3429.48 2720.78,3429.48 2790.78,3429.48 2860.78,3429.48 2930.78,3429.48 3070.78,3429.48 130.78,3499.48 2510.78,3499.48 2580.78,3499.48 2650.78,3499.48 2720.78,3499.48 2790.78,3499.48 2860.78,3499.48 2930.78,3499.48 3070.78,3499.48 130.78,3569.48 2020.78,3569.48 2510.78,3569.48 2580.78,3569.48 2650.78,3569.48 2720.78,3569.48 2790.78,3569.48 2860.78,3569.48 3070.78,3569.48 130.78,3639.48 2020.78,3639.48 2160.78,3639.48 2510.78,3639.48 2580.78,3639.48 2650.78,3639.48 2720.78,3639.48 2790.78,3639.48 3000.78,3639.48 3070.78,3639.48 130.78,3709.48 900.78,3709.48 2020.78,3709.48 2370.78,3709.48 2930.78,3709.48 3000.78,3709.48 3070.78,3709.48 830.78,3779.48 2020.78,3779.48 2090.78,3779.48 2370.78,3779.48 2440.78,3779.48 2510.78,3779.48 2580.78,3779.48 2650.78,3779.48 2720.78,3779.48 2790.78,3779.48 2860.78,3779.48 2930.78,3779.48 270.78,3849.48 340.78,3849.48 410.78,3849.48 480.78,3849.48 550.78,3849.48 620.78,3849.48 690.78,3849.48 760.78,3849.48 830.78,3849.48 2020.78,3849.48 2090.78,3849.48 2160.78,3849.48 2370.78,3849.48 2440.78,3849.48 2510.78,3849.48 2580.78,3849.48 2650.78,3849.48 2720.78,3849.48 2790.78,3849.48 2860.78,3849.48 2930.78,3849.48
  other v3: 1480.3,885.55 1516.83,888.27 2760,1720.38 2449.14,1916.35 1971.05,2918.26
J3-2: C19.1 D15.1 J2.2 R60.2 | length 728.8
  Top Layer w15: D15.1 1905,705 R60.2 1910,580 1950,540 2095,540 2144.53,490.47 J2.2
J3-3: C18.1 D14.1 J2.3 R47.2 | length 701.5
  Top Layer w15: J2.3 2260,351.75 2260,445 2340,525 2455,525 2525,595 R47.2 C18.1 2685,700 D14.1
LED1: LED1.2 U2.2 | length 292.1
  Top Layer w8: LED1.2 2377.23,2185 2461.37,2100.86 2461.37,2066.88 2487.35,2040.91 U2.2
NetC7_1: C7.1 U5.6 | length 110.2
  Top Layer w10: C7.1 1831.52,2850 1871.52,2890 U5.6
NetC11_2: C11.2 R20.1 R25.2 TP2.1 U2.10 | length 1902.5
  Top Layer w8: v3(2440.15,2325.87) 2440.15,2703.91 2600,2863.77 R20.1 ; TP2.1 2479.44,1706.68 2452.17,1733.95 2452.17,1855.24 2480.36,1883.43 U2.10 v3(2589.6,1883.43)
  Top Layer w10: R20.1 C11.2 R25.2
  Bottom Layer w8: v3(2440.15,2325.87) 2505.97,2325.87 2589.6,2242.24 v3(2589.6,1883.43)
NetC12_1: C12.1 R6.2 R21.1 U4.3 | length 279.1
  Top Layer w8: R6.2 2395,3010 2415,2990 C12.1
  Top Layer w10: R21.1 C12.1 U4.3
NetC15_1: C15.1 U3.1 | length 252.7
  Top Layer w8: U3.1 1531.34,820 1552.41,841.07 1552.41,959.75 1527.16,985 C15.1
NetC15_2: C15.2 U3.3 | length 190.3
  Top Layer w8: U3.3 1395,958.35 1421.65,985 C15.2
NetC16_1: C16.1 U3.2 | length 109.1
  Top Layer w8: C16.1 1435,881.38 1445,871.38 U3.2
NetC17_1: C17.1 U3.5 | length 108.8
  Top Layer w8: C17.1 1285.94,888.58 1295,879.53 U3.5
NetC17_2: C17.2 U3.4 | length 105
  Top Layer w8: U3.4 C17.2
NetC22_1: C22.1 U2.5 Y1.1 | length 340.3
  Top Layer w8: C22.1 2325,2042.24 Y1.1 2392.37,2017.24 2427.76,1981.85 U2.5
NetC23_1: C23.1 U2.6 Y1.2 | length 342
  Top Layer w8: C23.1 2325,1897.76 Y1.2 2387.31,1922.76 2426.72,1962.17 U2.6
NetC24_1: C24.1 U3.6 | length 108.3
  Top Layer w8: C24.1 1225,882.42 1245,862.42 U3.6
NetC32_2: C32.2 J2.10 J2.11 pad.0@3051.18,98.43 R72.2
NetD2_1: D2.1 K1.4 Q1.3 | length 368.5
  Bottom Layer w20: Q1.3 934.21,3414.21 K1.4 1010,3490 D2.1
NetD3_2: D3.2 L1.1 U1.2 | length 750.5
  Top Layer w50: L1.1 442.44,1531.85 554.29,1420 D3.2 680,1410 U1.2
NetD4_1: D4.1 K2.4 Q5.3 | length 307.9
  Bottom Layer w20: Q5.3 945,2632.5 K2.4 1035,2861.3 D4.1
NetJ1_4: J1.4 J1.5 J1.6 Q15.3
  other v2: 573.01,2306.34 667.34,2306.34 508.09,2374.12 655.82,2441.5 508.09,2506.22 648.3,2570.38
NetJ3_1: J3.1 J3.2 J3.3 K2.1
  other v2: 501.61,2846.41 651.15,2846.41 651.15,2985 505.42,2986.43 497.53,3085 648.3,3085
NetJ3_4: J3.4 J3.5 J3.6 K1.1
  other v2: 496.85,3328.37 491.13,3516.02 650.2,3522.68 488.75,3631.27 651.15,3631.27 648.3,3738.9 470.18,3739.85
NetK1_3: K1.3 K2.3 Q4.2
  other v2: 1419.81,3060.72 1530,3145 1607.46,3280 1722.71,3292.5 1830.34,3292.5 1607.46,3404.57 1830.34,3415 1720.8,3422.67 1600.79,3510.3 1836.05,3516.02 1722.71,3524.59 1595,3617.5 1836.05,3625 1716.04,3635.91 1595,3733.18 1836.05,3733.18 1716.04,3736.04 1460,3739.85 1585,3833.91 1700,3833.91 1469.34,3836.05 1830.34,3837
NetL2_1: L2.1 U2.1 | length 375.7
  Top Layer w8: L2.1 2368.24,2325 2527.52,2165.72 U2.1
NetLED1_1: LED1.1 R1.1 | length 76.7
  Top Layer w8: LED1.1 2262.9,2189.19 R1.1
NetQ1_1: Q1.1 R10.2 R11.2 | length 147.9
  Bottom Layer w20: Q1.1 754.91,3240.09 R11.2 R10.2
NetQ2_1: Q2.1 R9.1 R12.1 | length 148.9
  Top Layer w8: Q2.1 2202.6,3477.4 R9.1 R12.1
NetQ2_3: Q2.3 R13.2 | length 70.8
  Top Layer w8: Q2.3 R13.2
NetQ3_1: Q3.1 R14.1 R16.2 | length 121.8
  Top Layer w8: R14.1 R16.2 2430,3501.61 Q3.1
NetQ3_3: Q3.3 R12.2 | length 125.3
  Top Layer w8: R12.2 2394.21,3400 Q3.3
NetQ4_1: Q4.1 R13.1 R17.1 TVS3.2 | length 550.5
  Top Layer w8: Q4.1 TVS3.2 2115,3753.82 2136.18,3775 R17.1 R13.1
NetQ5_1: Q5.1 R18.2 R19.2 | length 123.6
  Bottom Layer w20: R18.2 R19.2 979.91,2469.91 Q5.1
NetR2_1: R2.1 U2.44 | length 233.4
  Top Layer w8: U2.44 2665.31,2211.97 2745,2291.66 R2.1
NetR3_1: R3.1 U2.31 | length 1320.4
  Top Layer w8: R3.1 2505.19,1500 2645.19,1360 v3(2840,1360) ; U2.31 v3(2915.95,1962.17)
  Bottom Layer w8: v3(2840,1360) 2840,1887.05 v3@2915.21,1962.25
NetR5_1: R5.1 U2.30 | length 1457.8
  Top Layer w8: R5.1 2160,1545 2490,1545 2645,1390 v3(2880,1390) ; U2.30 2897.45,1942.48 v3(2917.09,1922.84)
  Bottom Layer w8: v3(2880,1390) 2880,1886.88 v3@2915.21,1922.09
NetR10_1: R10.1 U2.20 | length 5034.2
  Top Layer w8: v1(105.11,1702.56) v1(105.11,3228.92) ; v3(2545.16,1643.38) 2700.55,1643.38 2724.37,1667.2 U2.20
  Bottom Layer w8: v1(105.11,1702.56) 150,1702.56 350.52,1502.03 2403.81,1502.03 v3(2545.16,1643.38) ; v1(105.11,3228.92) 540.52,3228.92 599.44,3170 R10.1
NetR18_1: R18.1 U2.19 | length 2646.4
  Top Layer w8: v3(1007.3,1846.63) 1418.75,1846.63 v3(1490.6,1774.78) ; v3(2554.11,1682.78) 2683.39,1682.78 2704.68,1704.08 U2.19
  Bottom Layer w8: R18.1 915,1938.93 v3(1007.3,1846.63) v3@1009.95,1843.97 ; v3(1490.6,1774.78) 1490.6,1648.59 1490,1647.98 1589.06,1548.92 2362.96,1548.92 2496.82,1682.78 v3(2554.11,1682.78)
NetR20_2: R20.2 U4.1 U4.2 | length 164.3
  Top Layer w10: U4.2 U4.1 2505.39,3065.91 2540,3100.51 R20.2
NetR21_2: R21.2 U5.7 | length 435
  Top Layer w10: U5.7 v3(1976.26,2840) ; v3(2297.76,2875) R21.2
  Bottom Layer w10: v3(1976.26,2840) 2262.17,2840 v3@2296.97,2874.8
NetR22_1: R22.1 R23.1 U4.5 | length 279
  Top Layer w30: R23.1 R22.1 2678.51,2865.57 2697.94,2885 U4.5
NetR24_2: R24.2 TP3.1 U4.7 | length 177.5
  Top Layer w30: U4.7 R24.2 2875,3085 TP3.1
NetR25_1: R25.1 U4.6 | length 360.2
  Top Layer w10: R25.1 2680,3089.47 2640,3049.48 2640,2970.78 2675.78,2935 U4.6
NetR47_1: R47.1 U3.14 | length 1343.5
  Top Layer w8: U3.14 v3@1395,703.73 ; R47.1 v3(2525,791.19)
  Bottom Layer w8: v3(1395.58,703.73) 1395.58,746.26 1419.76,770.44 2504.25,770.44 v3(2525,791.19)
NetR60_1: R60.1 U3.13 | length 787
  Top Layer w8: v3(1344.75,697.87) 1345,697.61 U3.13 ; R60.1 v3(1910,796.95)
  Bottom Layer w8: v3(1344.75,697.87) 1344.75,745.28 1396.41,796.95 v3(1910,796.95)
NetR62_1: R62.1 U8.7 | length 388.9
  Top Layer w15: U8.7 2215,1015 2310,920 R62.1
NetR69_1: R69.1 U8.6 | length 364.1
  Top Layer w15: R69.1 2130,965 2165,1000 U8.6
RST: C25.2 R4.2 U2.7 | length 423.4
  Top Layer w8: R4.2 C25.2 2375.87,1750 2404.57,1778.71 2404.57,1908.77 2438.28,1942.48 U2.7
RXD1_485: R3.2 U8.1 | length 105
  Top Layer w15: U8.1 R3.2
RXD_233: P4.3 U2.13 U3.12 | length 3654.4
  Top Layer w8: P4.3 810,368.39 847.25,405.64 1273.8,405.64 1321.04,452.88 1321.04,507.27 1295,533.31 U3.12 ; U2.13 2586.57,1724.87 v3(2587.2,1724.24) ; v3(2626.15,1251.08) 2781.26,1095.96 v3(2781.26,657.41)
  Top Layer w15: U3.12 v3(1295,655)
  Bottom Layer w8: v3(1295,655) 2778.85,655 v3(2781.26,657.41) ; v3@2586.26,1727.72 2654.88,1659.1 2654.88,1279.8 v3(2626.15,1251.08)
SWCLK: SWD1.3 U2.37
SWDIO: SWD1.2 U2.34
TXD1_485: R5.2 U8.4 | length 105
  Top Layer w15: U8.4 R5.2
TXD_232: P4.2 R15.2 U2.12 U3.11 | length 3826.9
  Top Layer w8: P4.2 710,354.99 786.43,431.42 1224.45,431.42 1245,451.98 R15.2 ; U3.11 R15.2 ; v3(1293.17,495) R15.2 ; v3(2527.52,1825.33) U2.12 ; v3(2578.16,537.6) 2738.85,537.6 2812.69,611.44 2812.69,1110.49 v3(2617.18,1306)
  Bottom Layer w8: v3(1293.17,495) 1335.76,537.6 v3(2578.16,537.6) ; v3@2527.23,1824.35 2527.23,1750.27 2617.18,1660.32 v3(2617.18,1306)
VDD5V: C2.1 C4.2 C13.2 C21.2 C33.2 L1.2 R23.2 U1.4 U4.8 U5.8 VR1.3 | length 5889.9
  Top Layer w10: v1(2527.57,2708.2) 2540.12,2720.76 R23.2
  Top Layer w30: v1(1798.85,2709.09) 1861.08,2709.09 1913.62,2761.63 U5.8@1913.62,2780.59 ; C21.2 C33.2 2805,3035.39 U4.8
  Top Layer w50: VR1.3 474.4,709.45 374.95,610 C13.2 C2.1 C4.2 L1.2 433.17,1138.15 571.17,1276.14 U1.4 ; v1(1809.92,1277.21) 1809.92,1805.23 v1(1935.64,1930.95) ; v1(2689.19,3035) U4.8
  Bottom Layer w50: v1(777.27,1277.21) v1(1809.92,1277.21) ; v1(1935.64,1930.95) 1935.64,2132.96 1798.85,2269.75 v1(1798.85,2709.09) 2607.41,2709.09 2688.4,2790.08 v1@2688.4,3033.84
VDD12V: C1.1 C3.2 C8.2 C9.2 D1.2 D2.2 D4.2 K1.5 K2.5 Q2.2 Q15.2 R9.2 U1.1 U5.1 U5.2 | length 4538.4
  Top Layer w20: R9.2 2270,3499.12 2277.4,3506.52 Q2.2 2279.19,3547.58 v3(2279.19,3599.29)
  Top Layer w50: D1.2 840,1846.63 950,1736.63 U1.1
  Bottom Layer w20: v3(845.6,2141.31) 845.6,2816.87 945,2916.28 K2.5 ; D2.2 1083.89,3685.39 ; D4.2 1035,3115 985,3165 K2.5 ; v3(2279.19,3599.29) 2279.19,3833.91 2199.39,3913.72 964.9,3913.72 935,3883.82 K1.5 1055.04,3808.7 1090,3773.74 1090,3407.91 945,3262.91 K2.5
  other v2: 1002.62,2127.18 1294.94,2166.99 1640.7,2182.71 1159.78,2270.72 1009.95,2282.25 1443.72,2291.68 1299.13,2297.96 1595,2297.96 1949.95,2304.11 1438.48,2410 1298.08,2417.4 1585,2417.4 1136.73,2420.55 1979.15,2448.81 2129.42,2465.41 1300,2531.57 1438.48,2533.7 1585,2533.7 1959.87,2611.14 2108.46,2614
VO+: K1.2 K2.2 U5.3 U5.4
  other v2: 1167.4,2708.3 1488.39,2768.3 1170.26,2847.36 1380.76,2882.6 1490,2882.6 1595,2882.6 1250,2890 1692.23,2965.47 1170.26,3000 1635.08,3036.91 1788.43,3052.15 1943.69,3055.96 1810,3158.83 1955.12,3158.83 1175.98,3179.78 1180,3365 1175.98,3538.87 1333.14,3544.59
pads on no net: J2.1 J2.6 J2.7 J2.8 U2.0 U2.3 U2.4 U2.11 U2.14 U2.15 U2.16 U2.17 U2.21 U2.22 U2.25 U2.26 U2.27 U2.28 U2.29 U2.33 U2.35 U2.36 U2.38 U2.39 U2.40 U2.41 U2.42 U2.43 U2.45 U2.46 U3.7 U3.9 VR1.4

## Polygon pours and split planes (outlines as drawn)
NetC32_2 on Top Layer "Top Layer-No Net" (solid, remove dead copper, pour order 2): 1575.55,486.51 1576.42,487.37 1862.17,487.37 1922.79,487.37 1930.58,479.58 1937.51,472.65 1937.51,311.59 2544.61,311.59 2665.84,432.82 2803.43,432.82 2836.34,432.82 2836.34,450.14 2836.34,618.99 2836.34,698.61 2856.37,718.65 2859.76,722.04 3033.76,722.04 3258.04,722.04 3273.62,706.45 3277.95,702.12 3277.95,-59.02 2923.79,-59.02 2922.06,-60.76 2870.97,-9.67 1871.7,-9.67 1615.52,-9.67 1599.02,-26.16 1580.46,-7.6 1580.46,485.13
GND on Top Layer "Top Layer-No Net" (solid, remove dead copper, pour order 0): -240.91,-67.03 -219.73,-45.85 1539.4,-67.03 1539.4,561.23 2354.27,561.23 2354.27,289.39 2536.8,289.39 2536.8,746.76 3764.55,746.76 3831.65,3629.52 3323.24,4137.92 3238.51,4222.66 -315.05,4222.66 -315.05,44.18 -209.13,-61.74
GND on Bottom Layer "Top Layer-No Net" (solid, remove dead copper, pour order 4): -240.91,-62.03 -219.73,-40.85 1539.4,-62.03 1539.4,566.23 2354.27,566.23 2354.27,294.39 2616.27,294.39 2616.27,751.76 3764.55,751.76 3831.65,3634.52 3323.24,4142.92 3238.51,4227.66 -315.05,4227.66 -315.05,49.18 -209.13,-56.74

## Keep-outs
Keep-Out Layer:
  lines w5: 6.1,5.4 3144,5.4 3144,3931.43 6.1,3931.43 6.1,5.4

## Other copper
Top Layer:
  rectangle net GND: 1955.12,3267.16 2046.81,3435
  rectangle net GND: 1325.36,1074.23 1452.13,1618.01
  rectangle net GND: 1148.29,1316.26 1643.87,1390.65
  rectangle net GND: 549.66,1870.65 598.05,2097.01
  rectangle net GND: 477.08,1967.97 670.1,2007.75
  rectangle net GND: 320,1670 370.29,2154.06
  rectangle net GND: 224.17,1787.58 462.01,1835.78
  rectangle net GND: 224.17,1937.58 462.01,1985.78
  rectangle net GND: 221.64,2084.98 467.25,2145.59
  region net VO+: 1475,3600 1020,3600 1020,2660 1555,2660 1860,2965 2015,2965 2015,2865 2165,2865 2190,2890 2190,3100 2100,3190 1700,3190 1495,2985 1285,2985 1255,3015 1255,3285 1290,3320 1460,3320 1490,3350 1490,3585
  region net NetJ3_1: 690,3220 920,2990 920,2900 785,2765 210,2765 170,2805 170,3180 210,3220
  region net NetJ3_4: 740,3815 905,3650 905,3505 640,3240 230,3240 190,3280 190,3755 250,3815
  region net NetK1_3: 1275,3280 1275,3020 1300,2995 1490,2995 1700,3205 1900,3205 1930,3235 1930,3865 1885,3910 1285,3910 1245,3870 1245,3655 1275,3625 1505,3625 1520,3610 1520,3335 1490,3305 1300,3305
  region net NetJ1_4: 695,2635 740,2590 740,2260 730,2250 470,2250 420,2200 190,2200 190,2635
  region net VDD12V: 1825,2635 2045,2855 2170,2855 2220,2805 2220,2460 1838.67,2078.67 920,2078.67 920,1915 750,1915 750,2120 750,2585 800,2635
Bottom Layer:
  region net NetJ3_4: 731.09,3797.9 893.08,3635.91 893.08,3556.22 565.84,3383.42 565.84,3248.17 245.76,3248.17 207.38,3286.55 207.38,3741.3 263.98,3797.9
  region net NetJ3_1: 772.98,3137.02 905.1,3004.9 905.1,2907.6 777.77,2780.27 199.73,2780.27 190,2790 190,3137.02
  region net NetJ1_4: 695,2635 740,2590 740,2260 730,2250 470,2250 420,2200 190,2200 190,2635
  region net VDD12V: 1673.28,2600.69 1673.28,2088.51 979.9,2088.51 979.91,2349.9 1230.7,2600.69
  region net NetK1_3: 1275,3280 1275,3020 1300,2995 1490,2995 1700,3205 1900,3205 1930,3235 1930,3865 1903.47,3891.53 1266.53,3891.53 1245,3870 1245,3655 1275,3625 1505,3625 1520,3610 1520,3335 1490,3305 1300,3305
  region net VO+: 1475,3600 1110,3600 1110,2660 1555,2660 1860,2965 2015,2965 2015,2865 2165,2865 2190,2890 2190,3100 2100,3190 1700,3190 1495,2985 1285,2985 1255,3015 1255,3285 1290,3320 1460,3320 1490,3350 1490,3585

## Silkscreen, mask and mechanical layers (free items; w line width, h text height)
Top Overlay:
  text "+" at 442.5,3599.29 h40
  text "+" at 456.47,3445.41 h40
  text "+" at 450,3287.9 h40
  text "-" at 450,3148.09 h40
  text "-" at 450,2995 h40
  text "-" at 450,2846.41 h40
  text "12V" at 446.16,2546.45 h40
  text "12V" at 446.16,2400.84 h40
  text "12V" at 445,2257.2 h40
  text "GND" at 429.76,2092.25 h40
  text "GND" at 431.83,1872.77 h40
  text "GND" at 452.53,1751.98 h40
Bottom Overlay:
  rectangle: 1140.66,822.08 1993.68,1670.33
  text "ELE MODULE V1.0 20210823" at 2116.87,1821.18 h80
  text "232_RXD" at 2164.47,702.27 h40 r90
  text "232_TXD" at 2280.83,698.26 h40 r90
  text "485_A" at 2386.18,617.7 h40 r90
  text "GND" at 2514.34,534.77 h40 r90
  text "485_A" at 1249.46,522.14 h40 r90
  text "485_B" at 1148.88,513.24 h40 r90
  text "GND" at 1345.82,513.23 h40 r90
  text "GND" at 615.15,429.08 h40 r90
  text "TXD" at 709.67,427.71 h40 r90
  text "RXD" at 827,418 h40 r90
  text "485_B" at 2012.47,261.22 h40 r90
Bottom Solder:
  rectangle: 1970.47,3225.31 2218.94,3375.27
  region: 695,2635 740,2590 740,2260 730,2250 470,2250 420,2200 190,2200 190,2635
  region: 772.98,3137.02 905.1,3004.9 905.1,2907.6 777.77,2780.27 199.73,2780.27 190,2790 190,3137.02
  region: 731.09,3796.43 893.08,3634.44 893.08,3554.76 565.84,3381.95 565.84,3246.7 245.76,3246.7 207.38,3285.09 207.38,3739.83 263.98,3796.43
  region: 1285.63,3270.57 1285.63,3009.37 1300,2995 1458.91,2995 1688.83,3224.92 1913.42,3224.92 1925.83,3237.33 1925.83,3858.61 1914.44,3870 1258.26,3870 1258.26,3662.31 1281.89,3638.68 1513.77,3638.68 1544.47,3607.98 1544.47,3328.03 1502.51,3286.07 1301.13,3286.07
  region: 1475,3600 1110,3600 1110,2675.79 1559.65,2675.79 1856.81,2972.95 2022.1,2972.95 2022.1,2871.62 2163.32,2871.62 2177.41,2885.7 2177.41,3098.03 2106.93,3168.5 1700.32,3168.5 1496.82,2965 1280.01,2965 1238.92,3006.1 1238.92,3287.9 1280.18,3329.16 1469.16,3329.16 1490,3350 1490,3585
Mechanical 1:
  the board outline again, w5

## Text inside footprints (layer, text, board x,y; h text height)
C1: Top Overlay "+" at 1122,2112 h60 r90
C2: Top Overlay "+" at 218.38,827.71 h50
J1: Mechanical 1 "J32" at 370,1752.75 h50 r90
J3: Mechanical 1 "J32" at 365,2802.75 h50 r90
K1: Top Overlay "COM" at 1154.82,3612.46 h31.5 r270
K2: Top Overlay "COM" at 1164.82,2968.76 h31.5 r270
Q4: Top Overlay "G" at 1957.12,3475 h31.5 r180; Top Overlay "S" at 1952.12,3325 h31.5 r180